# EAGLE board IV-18_test (EAGLE 6.4)
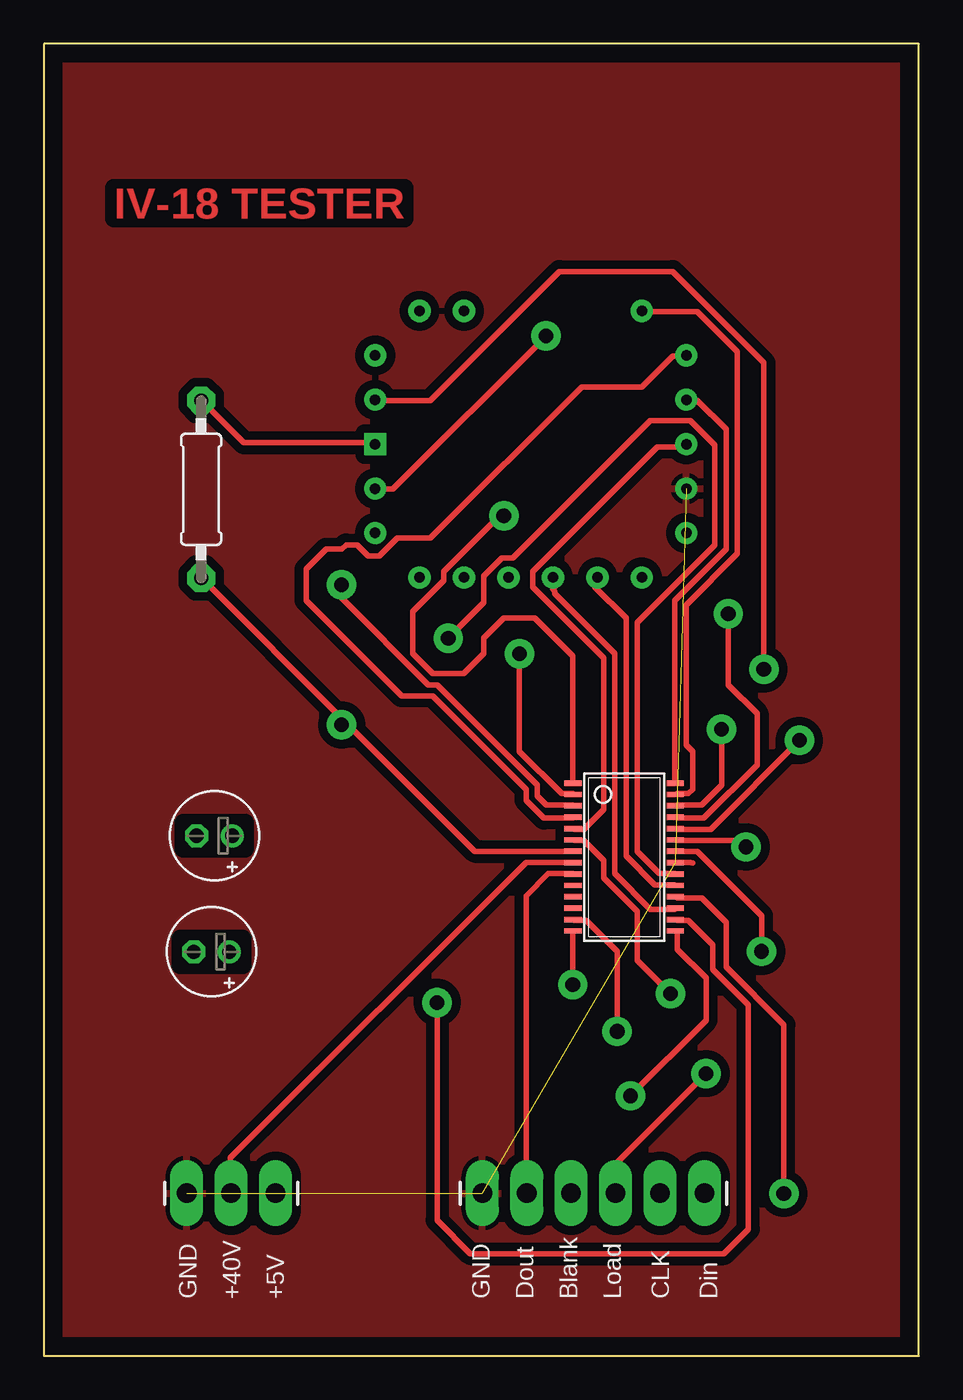
[diagram p0: board, top side]
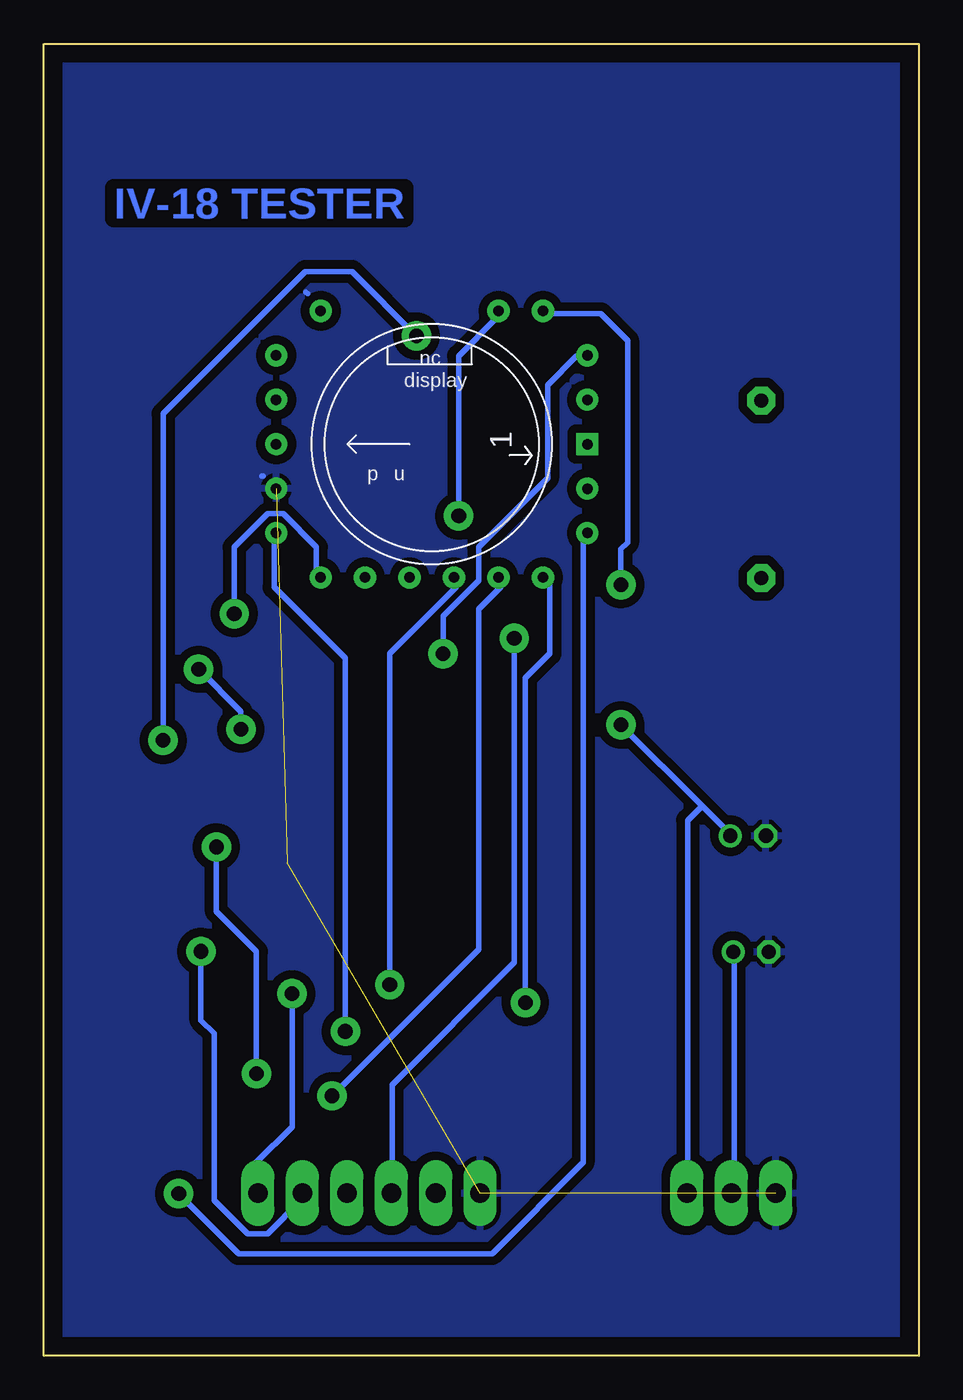
[diagram p1: board, bottom side, seen from below]

Size 50 x 75 mm. Coordinates in mm from the lower left corner, seen from the top.
Outline: 0,0 50,0 50,75 0,75 0,0
Copper layers (1*16): Top 0.035mm / dielectric 1.5mm / Bottom 0.035mm
Design rules "iStivi *": minimum track width 12mil, minimum drill 0.84mm, track to track 10mil, track to pad 10mil, pad to pad 10mil, via to via 2mm, smd to smd 10mil, copper to edge 40mil, drill to drill 8mil, minimum pad ring 10mil, minimum via ring 10mil, stop-mask expansion 0mil, vias tented up to drill 0mil, thermal gap 10mil

## Footprints (pad centres in the part's own frame; a part is rotated, then mirrored left to right if it is on the bottom)
E2-5 = drill 0.813 pad 1.27: + -1.016,0 | drill 0.813 pad 1.27 octagon: - 1.016,0
IV-18_SQUARE = drill 0.6 pad 1.27 square: 1 0,-8.89 | drill 0.6 pad 1.27: 2 2.54,-8.89; 3 5.08,-8.89; 4 7.62,-6.35; 5 7.62,-3.81; 9 7.62,6.35; 10 5.08,8.89; 11 2.54,8.89; 12 0,8.89; 13 -2.54,8.89; 14 -5.08,8.89; 15 -7.62,6.35; 16 -7.62,3.81; 17 -7.62,1.27; 18 -7.62,-1.27; 19 -7.62,-3.81; 20 -7.62,-6.35; 21 -5.08,-8.89; 22 -2.54,-8.89
1X06_LONGPADS = drill 1.118 pad 1.88 long: 1 0,0; 2 2.54,0; 3 5.08,0; 4 7.62,0; 5 10.16,0; 6 12.7,0
1X03_LONGPADS = drill 1.118 pad 1.88 long: 1 0,0; 2 2.54,0; 3 5.08,0
0207/10 = drill 0.8 pad 1.6 octagon: 1 -5.08,0; 2 5.08,0
TSSOP28 = smd 0.305 x 0.991: 1 -4.225,-2.918; 2 -3.575,-2.918; 3 -2.925,-2.918; 4 -2.275,-2.918; 5 -1.625,-2.918; 6 -0.975,-2.918; 7 -0.325,-2.918; 8 0.325,-2.918; 9 0.975,-2.918; 10 1.625,-2.918; 11 2.275,-2.918; 12 2.925,-2.918; 13 3.575,-2.918; 14 4.225,-2.918; 15 4.225,2.918; 16 3.575,2.918; 17 2.925,2.918; 18 2.275,2.918; 19 1.625,2.918; 20 0.975,2.918; 21 0.325,2.918; 22 -0.325,2.918; 23 -0.975,2.918; 24 -1.625,2.918; 25 -2.275,2.918; 26 -2.925,2.918; 27 -3.575,2.918; 28 -4.225,2.918

## Placement (x,y rotation side)
C1  10uF  [E2-5]  9.75,29.73 180 top
C2  100nF  [E2-5]  9.59,23.09 180 top
DIS1  IV18-SQUARE  [IV-18_SQUARE]  27.83,52.11 90 bottom
JP1  [1X06_LONGPADS]  25.06,9.29 0 top
JP2  [1X03_LONGPADS]  8.17,9.29 0 top
R1  56R  [0207/10]  8.99,49.53 270 top
U$1  MAX6921AUI  [TSSOP28]  33.17,28.51 270 top

## Library data of the parts
C1 C2 R1 = iStivi - RCLD
DIS1 = iStivi - Tubes
JP1 JP2 = iStivi - Header-Connector
U$1 = iStivi - ICs

## Nets
GND: C1.- C2.- DIS1.13 JP1.1 JP2.1 U$1.21
N$1: DIS1.12 U$1.5
N$2: DIS1.10 U$1.4
N$3: DIS1.4 U$1.3
N$4: DIS1.3 U$1.2
N$5: DIS1.5 U$1.1
N$6: DIS1.11 U$1.28
N$7: DIS1.9 U$1.27
N$8: DIS1.2 U$1.26
N$9: DIS1.15 U$1.25
N$10: DIS1.22 U$1.24
N$11: DIS1.16 U$1.19
N$12: DIS1.21 U$1.18
N$13: DIS1.17 U$1.17
N$14: DIS1.20 U$1.16
N$15: DIS1.19 U$1.15
N$16: DIS1.18 U$1.14
N$17: DIS1.14 U$1.13
N$18: JP1.6 U$1.6
N$19: JP1.5 U$1.22
N$20: JP1.4 U$1.23
N$21: JP1.3 U$1.20
N$22: JP1.2 U$1.9
VBB: C2.+ JP2.2 U$1.8
VBIAS: DIS1.1 R1.1
VCC: C1.+ JP2.3 R1.2 U$1.7

## Tracks (layer width: path | path; a pad name or v marks a point on that pad's centre or on a via)
GND  (3 unrouted)
  Top 0.305: U$1.21 36.2,28.19 36.96,28.19 37.08,28.18
  Bottom 0.305: 37.47,50.29 37.55,50.28 | 34.92,60.71 35.02,60.8
  pour Bottom (isolate 0.5): 0,0 50,0 50,75 0,75
  pour Top (isolate 0.5): 0,0 50,0 50,75 0,75
N$1
  Top 0.305: U$1.5 30.35,30.1 30.86,30.1 32,31.24 32,39.88 27.94,43.94 27.94,44.83 35.05,51.94 36.58,51.94 36.7,52.07 DIS1.12
N$2
  Top 0.305: DIS1.10 36.7,57.15 35.94,57.15 34.16,55.37 30.73,55.37 22.1,46.74 20.19,46.74 19.18,45.72 18.54,45.72 17.91,46.35 17.27,46.35 17.02,46.1 16.13,46.1 14.99,44.96 14.99,43.18 20.45,37.72 22.23,37.72 27.56,32.38 27.56,31.75 28.57,30.73 30.23,30.73 U$1.4
N$3  (via drill 0.84)
  Top 0.305: v17.02,44.07 17.02,43.31 21.97,38.35 22.48,38.35 28.19,32.64 28.19,32 28.7,31.5 30.23,31.5 U$1.3
  Bottom 0.305: v17.02,44.07 17.02,46.1 16.64,46.48 16.64,58.04 18.16,59.56 21.34,59.56 21.46,59.69 DIS1.4
N$4  (via drill 0.84)
  Top 0.305: v27.18,40.13 27.18,34.54 29.59,32.13 30.23,32.13 U$1.2
  Bottom 0.305: v27.18,40.13 27.18,42.29 25.15,44.32 25.15,46.23 21.21,50.16 21.21,55.5 19.56,57.15 19.05,57.15 DIS1.3
N$5  (via drill 0.84)
  Top 0.305: v26.29,48.01 26.04,48.01 22.86,44.83 22.86,44.32 21.08,42.55 21.08,40.13 22.23,38.99 24,38.99 25.15,40.13 25.15,41.02 26.29,42.16 28.07,42.16 30.23,40.01 30.23,32.77 U$1.1
  Bottom 0.305: v26.29,48.01 26.29,57.15 24.13,59.31 24.13,59.69 DIS1.5
N$6
  Top 0.305: U$1.28 36.07,32.77 36.07,43.18 38.99,46.1 38.99,52.96 37.34,54.61 36.83,54.61 DIS1.11
N$7
  Top 0.305: U$1.27 36.2,32.13 36.83,32.13 37.08,32.38 37.08,34.54 36.7,34.92 36.7,42.93 39.62,45.85 39.62,57.4 37.34,59.69 34.29,59.69 DIS1.9
N$8  (via drill 0.84)
  Top 0.305: v38.73,35.81 38.73,32.64 37.59,31.5 36.2,31.5 U$1.26 | v41.15,39.24 41.15,56.77 35.94,61.98 29.46,61.98 22.1,54.61 19.05,54.61 DIS1.2
  Bottom 0.305: v38.73,35.81 38.73,36.83 v41.15,39.24
N$9  (via drill 0.84)
  Top 0.305: v39.12,42.42 39.12,38.35 40.77,36.7 40.77,33.78 37.72,30.73 36.2,30.73 U$1.25
  Bottom 0.305: v39.12,42.42 39.12,46.23 37.21,48.13 36.32,48.13 34.42,46.23 34.42,44.7 34.29,44.58 DIS1.15
N$10  (via drill 0.84)
  Top 0.305: v43.18,35.18 38.1,30.1 36.2,30.1 U$1.24 | v28.7,58.29 19.94,49.53 19.05,49.53 DIS1.22
  Bottom 0.305: v43.18,35.18 43.18,53.85 35.05,61.98 32.38,61.98 v28.7,58.29
N$11
  Top 0.305: U$1.19 36.07,26.92 34.92,26.92 33.27,28.57 33.27,42.16 31.5,43.94 31.5,44.32 31.62,44.45 DIS1.16
N$12  (via drill 0.84)
  Top 0.305: v42.29,9.27 42.29,18.92 38.99,22.23 38.99,24.77 37.59,26.16 36.2,26.16 U$1.18
  Bottom 0.305: v42.29,9.27 38.86,5.84 24.38,5.84 19.18,11.05 19.18,46.86 19.05,46.99 DIS1.21
N$13
  Top 0.305: U$1.17 36.07,25.53 34.67,25.53 32.64,27.56 32.64,40.13 29.21,43.56 29.21,43.69 29.08,43.81 29.21,43.94 29.21,44.45 DIS1.17
N$14  (via drill 0.84)
  Top 0.305: v22.48,20.19 22.48,7.75 24.38,5.84 38.86,5.84 40.26,7.24 40.26,20.07 38.23,22.1 38.23,23.5 36.83,24.89 36.2,24.89 U$1.16
  Bottom 0.305: v22.48,20.19 22.48,38.73 21.08,40.13 21.08,44.07 21.46,44.45 DIS1.20
N$15  (via drill 0.84)
  Top 0.305: v33.53,14.86 37.85,19.18 37.85,21.59 36.2,23.24 36.2,24.26 U$1.15
  Bottom 0.305: v33.53,14.86 25.15,23.24 25.15,42.67 23.88,43.94 23.88,44.32 24,44.45 DIS1.19
N$16  (via drill 0.84)
  Top 0.305: v30.23,21.21 30.23,24.26 U$1.14
  Bottom 0.305: v30.23,21.21 30.23,40.13 26.42,43.94 26.42,44.32 26.54,44.45 DIS1.18
N$17  (via drill 0.84)
  Top 0.305: v32.77,18.54 32.77,23.11 30.99,24.89 30.35,24.89 U$1.13
  Bottom 0.305: v32.77,18.54 32.77,39.88 36.83,43.94 36.83,46.99 DIS1.14
N$18  (via drill 0.84)
  Top 0.305: v35.81,20.7 33.91,22.61 33.91,25.4 32,27.3 32,28.32 30.86,29.46 30.35,29.46 U$1.6
  Bottom 0.305: v35.81,20.7 35.81,13.08 37.85,11.05 37.85,9.4 JP1.6
N$19  (via drill 0.84)
  Top 0.305: v41.02,23.11 41.02,25.15 37.34,28.83 36.2,28.83 U$1.22
  Bottom 0.305: v41.02,23.11 41.02,19.18 40.26,18.41 40.26,8.89 38.35,6.99 37.21,6.99 35.31,8.89 35.31,9.27 JP1.5
N$20  (via drill 0.84)
  Top 0.305: v40.13,29.08 39.75,29.46 36.2,29.46 U$1.23 | v37.85,16.13 32.77,11.05 32.77,9.4 JP1.4
  Bottom 0.305: v40.13,29.08 40.13,25.4 37.85,23.11 v37.85,16.13
N$21  (via drill 0.84)
  Top 0.305: v23.11,41.02 25.15,43.05 25.15,44.58 26.16,45.59 26.8,45.59 34.67,53.47 36.96,53.47 38.35,52.07 38.35,46.35 33.91,41.91 33.91,28.83 35.18,27.56 36.07,27.56 U$1.20
  Bottom 0.305: v23.11,41.02 23.11,22.48 30.1,15.49 30.1,9.4 JP1.3
N$22
  Top 0.305: U$1.9 30.23,27.56 28.83,27.56 27.56,26.29 27.56,9.4 JP1.2
VBB
  Top 0.305: U$1.8 30.23,28.19 27.56,28.19 10.67,11.3 10.67,9.4 JP2.2
  Bottom 0.305: C2.+ 10.54,22.99 10.54,9.53 10.67,9.4 JP2.2
VBIAS
  Top 0.305: DIS1.1 18.92,52.2 11.43,52.2 9.02,54.61 R1.1
VCC  (via drill 0.84)
  Top 0.305: 17.21,36.26 9.02,44.45 R1.2 | 17.21,36.26 24.64,28.83 30.23,28.83 U$1.7 | 17.21,36.26 v17.02,36.07
  Bottom 0.305: v17.02,36.07 12.38,31.43 | 12.38,31.43 10.79,29.84 C1.+ | 12.38,31.43 13.21,30.61 13.21,9.4 JP2.3

## Text on the board
Top: IV-18 TESTER
Bottom: IV-18 TESTER
tNames: GND | +40V | +5V | GND | Dout | Blank | Load | CLK | Din